# Altium PCB Scoreboard.PcbDoc
Units mil, origin at the board's own origin, x right, y up, seen from the top; angles counter-clockwise.
Board outline 3190 x 2140 mil, 2 copper layers (Top Layer, Bottom Layer); 14 components, 49 nets, 259 pads, 1 vias.
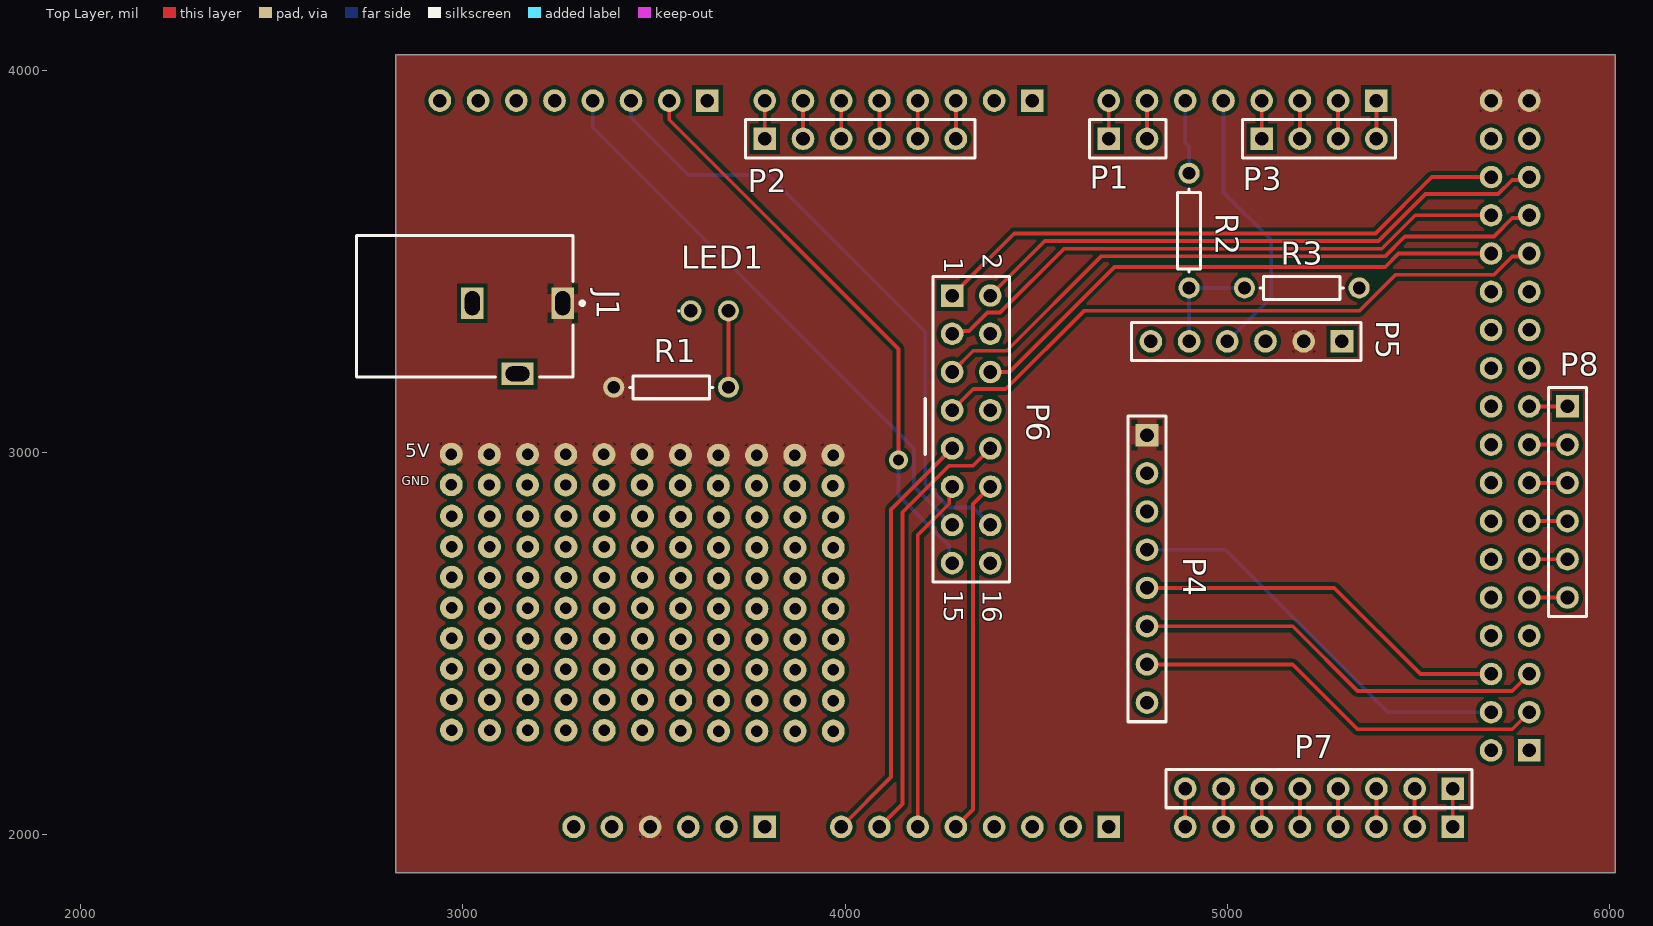
[diagram p0: Top Layer view]
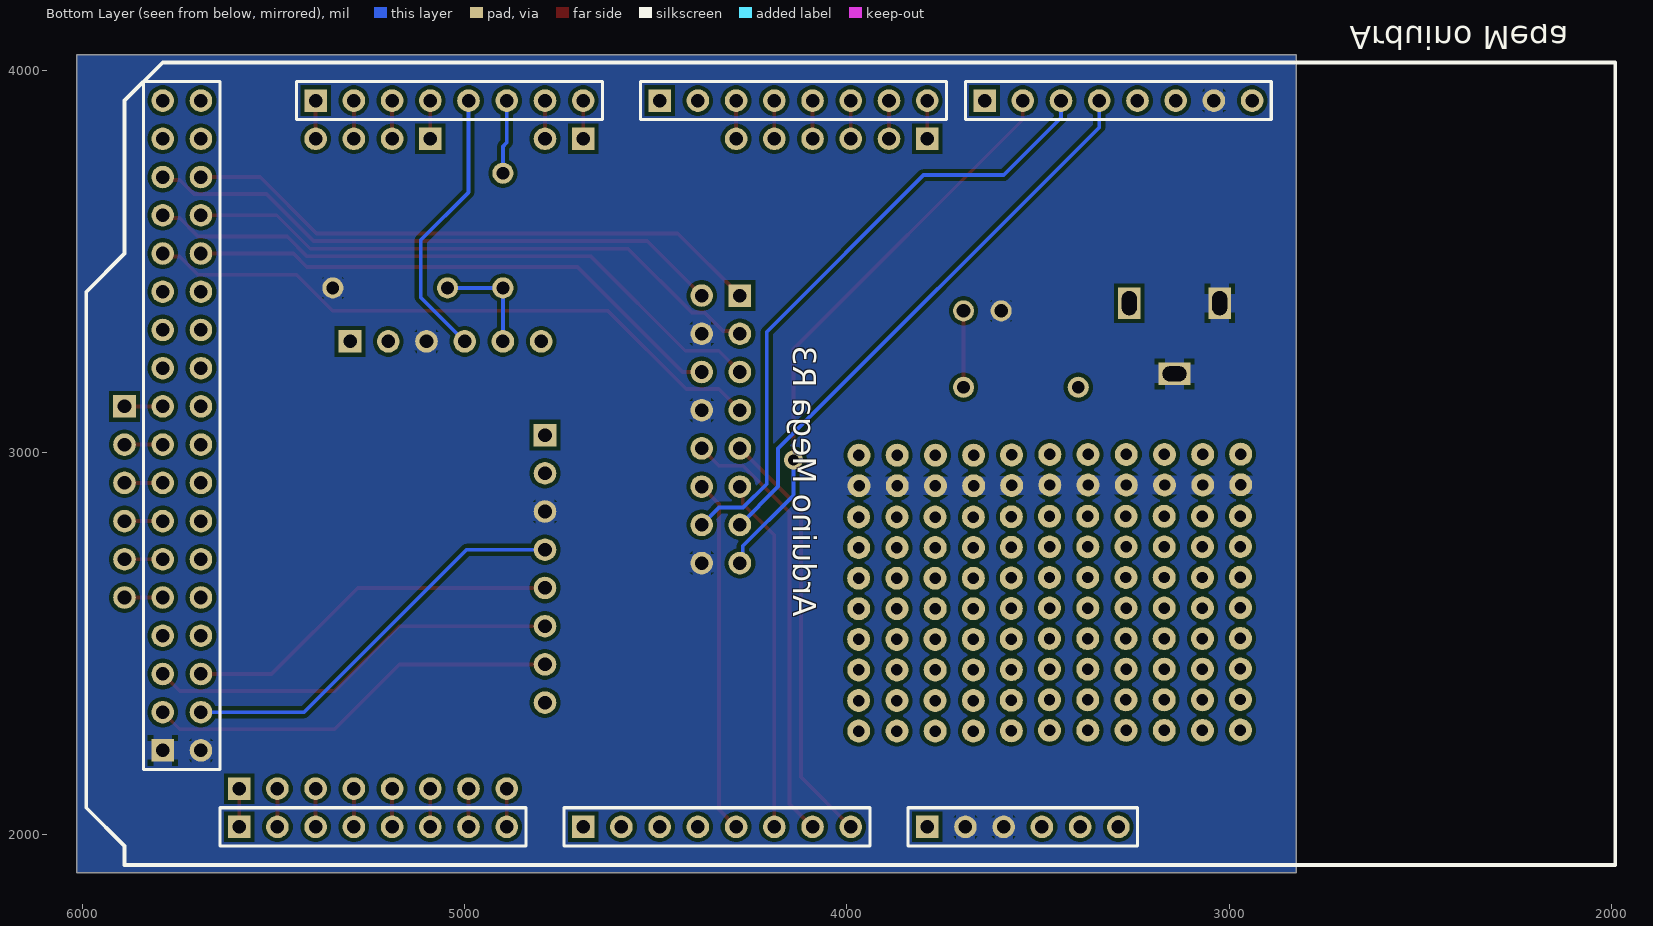
[diagram p1: Bottom Layer view, seen from below]

## Layer stack, top to bottom
Top Solder: solder mask 0.4, Solder Resist, Dk 3.5
Top Layer: signal copper 1.4
Dielectric 1: dielectric 12.6, FR-4, Dk 4.8
Bottom Layer: signal copper 1.4
Bottom Solder: solder mask 0.4, Solder Resist, Dk 3.5

## Board outline
2825,1900 6015,1900 6015,4040 2825,4040

## Design rules (kind name [scope] priority, off if disabled: settings)
Clearance [All] p1: gap=10 ignorepadtopadclearanceinfootprint=FALSE except(0: Arc-Hole Track-Hole SMDPad-Hole THPad-Hole Via-Hole Fill-Hole Poly-Hole Region-Hole Text-Hole)
PolygonConnect [All] p1: connectstyle=Relief reliefconductorwidth=50 reliefentries=4 polygonreliefangle="90 Angle" airgapwidth=10
RoomDefinition Scoreboard [InComponentClass('Scoreboard')] p1: confinementstyle=ConfineIn formatcopy=TRUE lockcomponents=FALSE outline 1740,1600 6210,1600 6210,4180 1740,4180
RoutingVias [All] p1: holewidth=28 width=50 viastyle="Through Hole" minholewidth=28 minwidth=50 maxholewidth=28 maxwidth=50
SolderMaskExpansion [All] p1: expansion=4 istentingtop=FALSE
Width [All] p1: maxlimit=10 minlimit=10 preferedwidth=10
30 further rules are at their usual default settings.

## Components (designator, comment, footprint, x,y, rotation, side; value= is the part's Value field where it differs from the comment)
"Arduino Mega" "ARDUINO MEGA" "ARDUINO MEGA" 4090,3020 r0 bottom locked
J1 "Barrel Jack" "PCB - CONNECTOR - BARREL - CUI PJ-102" 3143.11,3390 r180 top
LED1 "LTH3MM12VFR4500" LTH3MM12VFR4500 3596.57,3370 r0 top
P1 "Header 2" HDR1X2 4690,3820 r0 top
P2 "Header 6" HDR1X6 3790,3820 r0 top
P3 "Header 4" HDR1X4 5090,3820 r0 top
P4 "SD Breakout" HDR1X8 4790,3045 r270 top
P5 "HC05" HDR1X6 5300,3290 r180 top
P6 "Header 8X2" HDR2X8 4280,3410 r270 top
P7 "Header 8" HDR1X8 5590,2120 r180 top
P8 "Header 6" HDR1X6 5890,3120 r270 top
R1 "Res1" AXIAL-0.3 3545,3170 r180 top value=1K
R2 "Res1" AXIAL-0.3 4900,3580 r90 top value=1K
R3 "Res1" AXIAL-0.3 5195,3430 r0 top value=2k

## Footprints (in the part's own frame and the unit in brackets; to place one, negate y for a bottom-side part, rotate by r counter-clockwise, add the part's x,y. Pads: shape width x height; smd on the part's side, far side on the other; paste and mask are expansions set on the pad)
"ARDUINO MEGA" [mm] "Arduino Mega 2560"
  rect 1.5x1.5 hole 0.9: 0(10.16,-22.86) 8(-11.43,-22.86) 21(33.02,-22.86) 59(-7.62,25.4) 67(15.24,25.4) 75(38.1,25.4) 79(43.18,20.32)
  round 1.5 hole 0.9: 1(7.62,-22.86) 2(5.08,-22.86) 3(2.54,-22.86) 4(0,-22.86) 5(-2.54,-22.86) 6(-5.08,-22.86) 7(-7.62,-22.86) 9(-13.97,-22.86) 10(-16.51,-22.86) 11(-19.05,-22.86) 12(-21.59,-22.86) 13(-24.13,-22.86) 14(15.24,-22.86) 15(17.78,-22.86) 16(20.32,-22.86) 17(22.86,-22.86) 18(25.4,-22.86) 19(27.94,-22.86) 20(30.48,-22.86) 22(40.64,-20.32) 23(43.18,-20.32) 24(40.64,-17.78) 25(43.18,-17.78) 26(40.64,-15.24) 27(43.18,-15.24) 28(40.64,-12.7) 29(43.18,-12.7) 30(40.64,-10.16) 31(43.18,-10.16) 32(40.64,-7.62) 33(43.18,-7.62) 34(40.64,-5.08) 35(43.18,-5.08) 36(40.64,-2.54) 37(43.18,-2.54) 38(40.64,0) 39(43.18,0) 40(40.64,2.54) 41(43.18,2.54) 42(40.64,5.08) 43(43.18,5.08) 44(40.64,7.62) 45(43.18,7.62) 46(40.64,10.16) 47(43.18,10.16) 48(40.64,12.7) 49(43.18,12.7) 50(40.64,15.24) 51(43.18,15.24) 52(40.64,17.78) 53(43.18,17.78) 54(-20.32,25.4) 55(-17.78,25.4) 56(-15.24,25.4) 57(-12.7,25.4) 58(-10.16,25.4) 60(-2.54,25.4) 61(0,25.4) 62(2.54,25.4) 63(5.08,25.4) 64(7.62,25.4) 65(10.16,25.4) 66(12.7,25.4) 68(20.32,25.4) 69(22.86,25.4) 70(25.4,25.4) 71(27.94,25.4) 72(30.48,25.4) 73(33.02,25.4) 74(35.56,25.4) 76(-26.67,-22.86) 77(-29.21,-22.86) 78(40.64,20.32) 80(43.18,-22.86) 81(40.64,-22.86)
  silkscreen extent -53.34,-25.4 48.26,27.94
AXIAL-0.3 [mm] "Axial Device, Thru-Hole; 2 Leads; 0.3 in Pin Spacing"
  round 1.4 hole 0.85: 1(-3.81,0) 2(3.81,0)
  silkscreen extent -2.77,-0.76 2.77,0.76
HDR1X2 [mm] "Connector; Header; 2 Position"
  rect 1.5x1.5 hole 0.9: 1(0,0)
  round 1.5 hole 0.9: 2(2.54,0)
  silkscreen extent -1.27,-1.27 3.81,1.27
HDR1X4 [mm] "Connector; Header; 4 Position"
  rect 1.5x1.5 hole 0.9: 1(0,0)
  round 1.5 hole 0.9: 2(2.54,0) 3(5.08,0) 4(7.62,0)
  silkscreen extent -1.27,-1.27 8.89,1.27
HDR1X6 [mm] "Connector; Header; 6 Position"
  rect 1.5x1.5 hole 0.9: 1(0,0)
  round 1.5 hole 0.9: 2(2.54,0) 3(5.08,0) 4(7.62,0) 5(10.16,0) 6(12.7,0)
  silkscreen extent -1.27,-1.27 13.97,1.27
HDR1X8 [mm] "Connector; Header; 8 Position"
  rect 1.5x1.5 hole 0.9: 1(0,0)
  round 1.5 hole 0.9: 2(2.54,0) 3(5.08,0) 4(7.62,0) 5(10.16,0) 6(12.7,0) 7(15.24,0) 8(17.78,0)
  silkscreen extent -1.27,-1.27 19.05,1.27
HDR2X8 [mm] "Connector; Header; 8x2 Position"
  rect 1.5x1.5 hole 0.9: 1(0,0)
  round 1.5 hole 0.9: 2(0,2.54) 3(2.54,0) 4(2.54,2.54) 5(5.08,0) 6(5.08,2.54) 7(7.62,0) 8(7.62,2.54) 9(10.16,0) 10(10.16,2.54) 11(12.7,0) 12(12.7,2.54) 13(15.24,0) 14(15.24,2.54) 15(17.78,0) 16(17.78,2.54)
  silkscreen extent -1.27,-1.27 19.05,3.81
LTH3MM12VFR4500 [mm]
  round 1.4 hole 0.91: 1(0,0) 2(2.5,0)
  silkscreen extent -0.85,-0.05 -0.75,0.05
"PCB - CONNECTOR - BARREL - CUI PJ-102" [mm] "THD, 3-Leads, Body 14.4x9mm, Height 11mm"
  rect 1.5x2.1 hole 1 slot 1.6 at 90 deg: 1(-3,0) 2(3,0)
  rect 2.1x1.5 hole 1 slot 1.6 at 0 deg: 3(0,4.7)
  silkscreen extent -4.43,-4.5 10.7,4.9, body extent -3.7,-4.5 10.7,4.9, height 11

## Part data
J1: library part 1341, "Power Barrel Connector Jack 2.50mm ID (0.098&quot;), 5.50mm OD (0.217&quot;) Through Hole, Right Angle", manufacturer="CUI Devices", Manufacturer part number=PJ-102B, Supplier Part Number 1=CP-102B-ND, Category=Connectors, Datasheet=https://www.cuidevices.com/product/resource/digikeypdf/pj-102b.pdf, Name="Barrel Jack 2.5mmx5.5mm", Rowan Part Number=1341, Status=Active, Supplier 1=Digi-Key
LED1: "LED RED", Manufacturer_Name="Visual Communications Company", Mouser Part Number=593-LTH3MM12VFR4500, Arrow Part Number=LTH3MM12VFR4500, Arrow Price/Stock=https://www.arrow.com/en/products/lth3mm12vfr4500/visual-communications?region=nac, Datasheet Link=https://vcclite.com/wp-content/uploads/wpallimport/files/files/LTH3MM12VFR4500.pdf, Height=5.55mm, Manufacturer_Part_Number=LTH3MM12VFR4500, Mouser Price/Stock=https://www.mouser.co.uk/ProductDetail/VCC/LTH3MM12VFR4500?qs=Mv7BduZupUhMUueo6XymDw%3D%3D
P1: "Header, 2-Pin", LatestRevisionDate=17-Jul-2002, LatestRevisionNote="Re-released for DXP Platform.", Publisher="Altium Limited"
P2 P8: "Header, 6-Pin", LatestRevisionDate=17-Jul-2002, LatestRevisionNote="Re-released for DXP Platform.", Publisher="Altium Limited"
P3: "Header, 4-Pin", LatestRevisionDate=17-Jul-2002, LatestRevisionNote="Re-released for DXP Platform.", Publisher="Altium Limited"
P4: library part "Header 8", "Header, 8-Pin", LatestRevisionDate=17-Jul-2002, LatestRevisionNote="Re-released for DXP Platform.", Publisher="Altium Limited"
P5: library part "Header 6", "Header, 6-Pin", LatestRevisionDate=17-Jul-2002, LatestRevisionNote="Re-released for DXP Platform.", Publisher="Altium Limited"
P6: "Header, 8-Pin, Dual row", LatestRevisionDate=17-Jul-2002, LatestRevisionNote="Re-released for DXP Platform.", Publisher="Altium Limited"
P7: "Header, 8-Pin", LatestRevisionDate=17-Jul-2002, LatestRevisionNote="Re-released for DXP Platform.", Publisher="Altium Limited"
R1 R2 R3: "Resistor", LatestRevisionDate=17-Jul-2002, LatestRevisionNote="Re-released for DXP Platform.", PackageDescription="Axial Device, Thru-Hole; 2 Leads; 0.3 in Pin Spacing", PackageReference=AXIAL-0.3, Published=8-Jun-2000, Publisher="Altium Limited"

## Free pads (board coordinates)
  round 60 hole 30: 65(2969.83,2915.09) 65(2970,2995) 65(2970.59,2273.25) 65(2970.59,2433.25) 65(2970.59,2593.25) 65(2970.59,2753.25) 65(2970.76,2353.16) 65(2970.76,2513.16) 65(2970.76,2673.16) 65(2970.76,2833.16) 65(3069.18,2914.33) 65(3069.35,2994.24) 65(3069.94,2272.49) 65(3069.94,2432.49) 65(3069.94,2592.49) 65(3069.94,2752.49) 65(3070.11,2352.4) 65(3070.11,2512.4) 65(3070.11,2672.4) 65(3070.11,2832.4) 65(3169.18,2914.33) 65(3169.35,2994.24) 65(3169.94,2272.49) 65(3169.94,2432.49) 65(3169.94,2592.49) 65(3169.94,2752.49) 65(3170.11,2352.4) 65(3170.11,2512.4) 65(3170.11,2672.4) 65(3170.11,2832.4) 65(3269.18,2914.33) 65(3269.35,2994.24) 65(3269.94,2272.49) 65(3269.94,2432.49) 65(3269.94,2592.49) 65(3269.94,2752.49) 65(3270.11,2352.4) 65(3270.11,2512.4) 65(3270.11,2672.4) 65(3270.11,2832.4) 65(3369.18,2914.33) 65(3369.35,2994.24) 65(3369.94,2272.49) 65(3369.94,2432.49) 65(3369.94,2592.49) 65(3369.94,2752.49) 65(3370.11,2352.4) 65(3370.11,2512.4) 65(3370.11,2672.4) 65(3370.11,2832.4) 65(3469.18,2914.33) 65(3469.35,2994.24) 65(3469.94,2272.49) 65(3469.94,2432.49) 65(3469.94,2592.49) 65(3469.94,2752.49) 65(3470.11,2352.4) 65(3470.11,2512.4) 65(3470.11,2672.4) 65(3470.11,2832.4) 65(3569.09,2913.16) 65(3569.27,2993.07) 65(3569.86,2271.32) 65(3569.86,2431.32) 65(3569.86,2591.32) 65(3569.86,2751.32) 65(3570.03,2351.23) 65(3570.03,2511.23) 65(3570.03,2671.23) 65(3570.03,2831.23) 65(3668.44,2912.4) 65(3668.61,2992.31) 65(3669.2,2270.56) 65(3669.2,2430.56) 65(3669.2,2590.56) 65(3669.2,2750.56) 65(3669.38,2350.47) 65(3669.38,2510.47) 65(3669.38,2670.47) 65(3669.38,2830.47) 65(3768.44,2912.4) 65(3768.61,2992.31) 65(3769.2,2270.56) 65(3769.2,2430.56) 65(3769.2,2590.56) 65(3769.2,2750.56) 65(3769.38,2350.47) 65(3769.38,2510.47) 65(3769.38,2670.47) 65(3769.38,2830.47) 65(3868.44,2912.4) 65(3868.61,2992.31) 65(3869.2,2270.56) 65(3869.2,2430.56) 65(3869.2,2590.56) 65(3869.2,2750.56) 65(3869.38,2350.47) 65(3869.38,2510.47) 65(3869.38,2670.47) 65(3869.38,2830.47) 65(3968.44,2912.4) 65(3968.61,2992.31) 65(3969.2,2270.56) 65(3969.2,2430.56) 65(3969.2,2590.56) 65(3969.2,2750.56) 65(3969.38,2350.47) 65(3969.38,2510.47) 65(3969.38,2670.47) 65(3969.38,2830.47)

## Via types
v1: diameter 50, hole 28, Top Layer to Bottom Layer, 1 vias

## Nets (pads, with @x,y where several pads share a name; then routed paths per layer and width w, separated by ;. In a path a pad name is that pad's centre, name@x,y a point inside that pad or via, vN(x,y) a via of type N, cw(c..) or ccw(c..) an arc to the next point about the centre after c; other vN are vias at no path point)
+5: "Arduino Mega.56" "Arduino Mega.80" "Arduino Mega.81" J1.1 P4.1 P5.2 pad.65@2970,2995 pad.65@3069.35,2994.24 pad.65@3169.35,2994.24 pad.65@3269.35,2994.24 pad.65@3369.35,2994.24 pad.65@3469.35,2994.24 pad.65@3569.27,2993.07 pad.65@3668.61,2992.31 pad.65@3768.61,2992.31 pad.65@3868.61,2992.31 pad.65@3968.61,2992.31 R1.2
A: "Arduino Mega.60" P6.9 | length 1110.1
  Top Layer w10: 3990,2020 4120,2150 4120,2850 P6.9
ARD_CLK: "Arduino Mega.52" P4.4 | length 1076
  Bottom Layer w10: P4.4 4995,2745 5420,2320 5690,2320
ARD_CS: "Arduino Mega.53" P4.7 | length 1088.7
  Top Layer w10: P4.7 5171.1,2445 5340.62,2275.47 5745.47,2275.47 5790,2320
ARD_MISO: "Arduino Mega.50" P4.5 | length 993.2
  Top Layer w10: P4.5 5280,2645 5505,2420 5690,2420
ARD_MOSI: "Arduino Mega.51" P4.6 | length 1088.7
  Top Layer w10: P4.6 5171.1,2545 5340.62,2375.47 5745.47,2375.47 5790,2420
ARD_RX: "Arduino Mega.17" P5.4 | length 729.4
  Bottom Layer w10: 4990,3920 4990,3680 5115,3555 5115,3405 P5.4
ARD_TX: "Arduino Mega.16" R2.2 | length 194.1
  Bottom Layer w10: 4890,3920 4890,3810 4900,3800 R2.2
B: "Arduino Mega.61" P6.10 | length 1147
  Top Layer w10: 4090,2020 4150,2080 4150,2842.97 4271.56,2964.53 4334.53,2964.53 P6.10
B1: "Arduino Mega.26" P6.3 | length 1538.4
  Top Layer w10: P6.3 4287.5,3317.5 4324.53,3317.5 4372.5,3365.47 4405.47,3365.47 4572.57,3532.57 5404.14,3532.57 5491.57,3620 5690,3620
B2: "Arduino Mega.29" P6.7 | length 1679.8
  Top Layer w10: P6.7 4335.47,3165.47 4420.47,3165.47 4625,3370 5345.19,3370 5439.72,3464.53 5697.5,3464.53 5745.47,3512.5 5782.5,3512.5 5790,3520
C: "Arduino Mega.62" P6.11 | length 927.3
  Top Layer w10: 4190,2020 4190,2782.97 4272.5,2865.47 4272.5,2902.5 P6.11
CLK: "Arduino Mega.11" P6.13 | length 1499.4
  Bottom Layer w10: 3340,3920 3340,3850 4180,3010 4180,2910 P6.13
D: "Arduino Mega.63" P6.12 | length 927.3
  Top Layer w10: 4290,2020 4335,2065 4335,2865 P6.12
G1: "Arduino Mega.25" P6.2 | length 1538.4
  Top Layer w10: P6.2 4522.57,3552.57 5395.85,3552.57 5518.76,3675.47 5708.44,3675.47 5745.47,3712.5 5782.5,3712.5 5790,3720
G2: "Arduino Mega.28" P6.6 | length 1438.4
  Top Layer w10: P6.6 4430,3210 4705,3485 5413.14,3485 5448.14,3520 5690,3520
GND: "Arduino Mega.57" "Arduino Mega.58" "Arduino Mega.76" "Arduino Mega.78" "Arduino Mega.79" J1.2 J1.3 LED1.1 P4.3 P5.3 P6.4 P6.8 P6.16 pad.65@2969.83,2915.09 pad.65@3069.18,2914.33 pad.65@3169.18,2914.33 pad.65@3269.18,2914.33 pad.65@3369.18,2914.33 pad.65@3469.18,2914.33 pad.65@3569.09,2913.16 pad.65@3668.44,2912.4 pad.65@3768.44,2912.4 pad.65@3868.44,2912.4 pad.65@3968.44,2912.4 R3.2
LAT: "Arduino Mega.10" P6.14 | length 1659.3
  Bottom Layer w10: 3440,3920 3440,3875 3590,3725 3800,3725 4210,3315 4210,2917.03 4271.56,2855.47 4334.53,2855.47 P6.14
"NetArduino Mega_2": "Arduino Mega.2" P2.6 | length 100
  Top Layer w10: P2.6 4290,3920
"NetArduino Mega_3": "Arduino Mega.3" P2.5 | length 100
  Top Layer w10: P2.5 4190,3920
"NetArduino Mega_4": "Arduino Mega.4" P2.4 | length 100
  Top Layer w10: P2.4 4090,3920
"NetArduino Mega_5": "Arduino Mega.5" P2.3 | length 100
  Top Layer w10: P2.3 3990,3920
"NetArduino Mega_6": "Arduino Mega.6" P2.2 | length 100
  Top Layer w10: P2.2 3890,3920
"NetArduino Mega_7": "Arduino Mega.7" P2.1 | length 100
  Top Layer w10: P2.1 3790,3920
"NetArduino Mega_14": "Arduino Mega.14" P1.1 | length 100
  Top Layer w10: P1.1 4690,3920
"NetArduino Mega_15": "Arduino Mega.15" P1.2 | length 100
  Top Layer w10: P1.2 4790,3920
"NetArduino Mega_18": "Arduino Mega.18" P3.1 | length 100
  Top Layer w10: P3.1 5090,3920
"NetArduino Mega_19": "Arduino Mega.19" P3.2 | length 100
  Top Layer w10: P3.2 5190,3920
"NetArduino Mega_20": "Arduino Mega.20" P3.3 | length 112.1
  Top Layer w10: 5290,3920 P3.3 5295,3820 P3.3@5300,3815
"NetArduino Mega_21": "Arduino Mega.21" P3.4 | length 100
  Top Layer w10: P3.4 5390,3920
"NetArduino Mega_37": "Arduino Mega.37" P8.1 | length 100
  Top Layer w10: 5790,3120 P8.1
"NetArduino Mega_39": "Arduino Mega.39" P8.2 | length 100
  Top Layer w10: 5790,3020 P8.2
"NetArduino Mega_41": "Arduino Mega.41" P8.3 | length 100
  Top Layer w10: 5790,2920 P8.3
"NetArduino Mega_43": "Arduino Mega.43" P8.4 | length 100
  Top Layer w10: 5790,2820 P8.4
"NetArduino Mega_45": "Arduino Mega.45" P8.5 | length 100
  Top Layer w10: 5790,2720 P8.5
"NetArduino Mega_47": "Arduino Mega.47" P8.6 | length 100
  Top Layer w10: 5790,2620 P8.6
"NetArduino Mega_68": "Arduino Mega.68" P7.8 | length 100
  Top Layer w10: 4890,2020 P7.8
"NetArduino Mega_69": "Arduino Mega.69" P7.7 | length 100
  Top Layer w10: 4990,2020 P7.7
"NetArduino Mega_70": "Arduino Mega.70" P7.6 | length 100
  Top Layer w10: 5090,2020 P7.6
"NetArduino Mega_71": "Arduino Mega.71" P7.5 | length 100
  Top Layer w10: 5190,2020 P7.5
"NetArduino Mega_72": "Arduino Mega.72" P7.4 | length 100
  Top Layer w10: 5290,2020 P7.4
"NetArduino Mega_73": "Arduino Mega.73" P7.3 | length 100
  Top Layer w10: 5390,2020 P7.3
"NetArduino Mega_74": "Arduino Mega.74" P7.2 | length 100
  Top Layer w10: 5490,2020 P7.2
"NetArduino Mega_75": "Arduino Mega.75" P7.1 | length 100
  Top Layer w10: 5590,2020 P7.1
NetLED1_2: LED1.2 R1.1 | length 200
  Top Layer w10: R1.1 LED1.2
NetP5_5: P5.5 R2.1 R3.1 | length 282.1
  Bottom Layer w10: P5.5 R2.1@4900,3425 ; R2.1 R2.1@4900,3425 ; R2.1@4905,3430 R2.1@4900,3425 ; R2.1@4910,3430 R3.1
OE: "Arduino Mega.9" P6.15 | length 1516.5
  Top Layer w10: 3540,3920 3540,3870 4140,3270 v1(4140,2980)
  Bottom Layer w10: v1(4140,2980) 4140,2930 4140,2887.03 4272.5,2754.53 4272.5,2717.5 P6.15
R1: "Arduino Mega.24" P6.1 | length 1538.4
  Top Layer w10: P6.1 4442.57,3572.57 5387.57,3572.57 5535,3720 5690,3720
R2: "Arduino Mega.27" P6.5 | length 1679.8
  Top Layer w10: P6.5 4335.47,3265.47 4422.9,3265.47 4670,3512.57 5412.42,3512.57 5464.38,3564.53 5697.5,3564.53 5745.47,3612.5 5782.5,3612.5 5790,3620
pads on no net: "Arduino Mega.0" "Arduino Mega.1" "Arduino Mega.8" "Arduino Mega.12" "Arduino Mega.13" "Arduino Mega.22" "Arduino Mega.23" "Arduino Mega.30" "Arduino Mega.31" "Arduino Mega.32" "Arduino Mega.33" "Arduino Mega.34" "Arduino Mega.35" "Arduino Mega.36" "Arduino Mega.38" "Arduino Mega.40" "Arduino Mega.42" "Arduino Mega.44" "Arduino Mega.46" "Arduino Mega.48" "Arduino Mega.49" "Arduino Mega.54" "Arduino Mega.55" "Arduino Mega.59" "Arduino Mega.64" "Arduino Mega.65" "Arduino Mega.66" "Arduino Mega.67" "Arduino Mega.77" P4.2 P4.8 P5.1 P5.6

## Polygon pours and split planes (outlines as drawn)
+5 on Top Layer "+5_L01_P000" (solid, pour order 0): 2825,4040 2825,1900 6015,1900 6015,4040
GND on Bottom Layer "GND_L02_P001" (solid, pour order 1): 2825,4040 2825,1900 6015,1900 6015,4040

## Silkscreen, mask and mechanical layers (free items; w line width, h text height)
Top Overlay:
  lines w10: 4210,2995 4210,3085 4210,3140
  text "5V" at 2850,2975.67 h60
  text "GND" at 2840,2905.44 h40
Mechanical 1:
  the board outline again, w10

## Text inside footprints (layer, text, board x,y; h text height)
"Arduino Mega": Bottom Overlay "Arduino Mega R3" at 4140,2570 h60 r90
P6: Top Overlay "16" at 4360,2640 h50 r270; Top Overlay "15" at 4260,2640 h50 r270; Top Overlay "1" at 4260,3510 h50 r270; Top Overlay "2" at 4360,3520 h50 r270